# Altium PCB IMU.PcbDoc
Units mm, origin at the board's own origin, x right, y up, seen from the top; angles counter-clockwise.
Board outline 47.31 x 51.69 mm, 2 copper layers (Top Layer, Bottom Layer); 5 components, 76 nets, 125 pads, 18 vias.
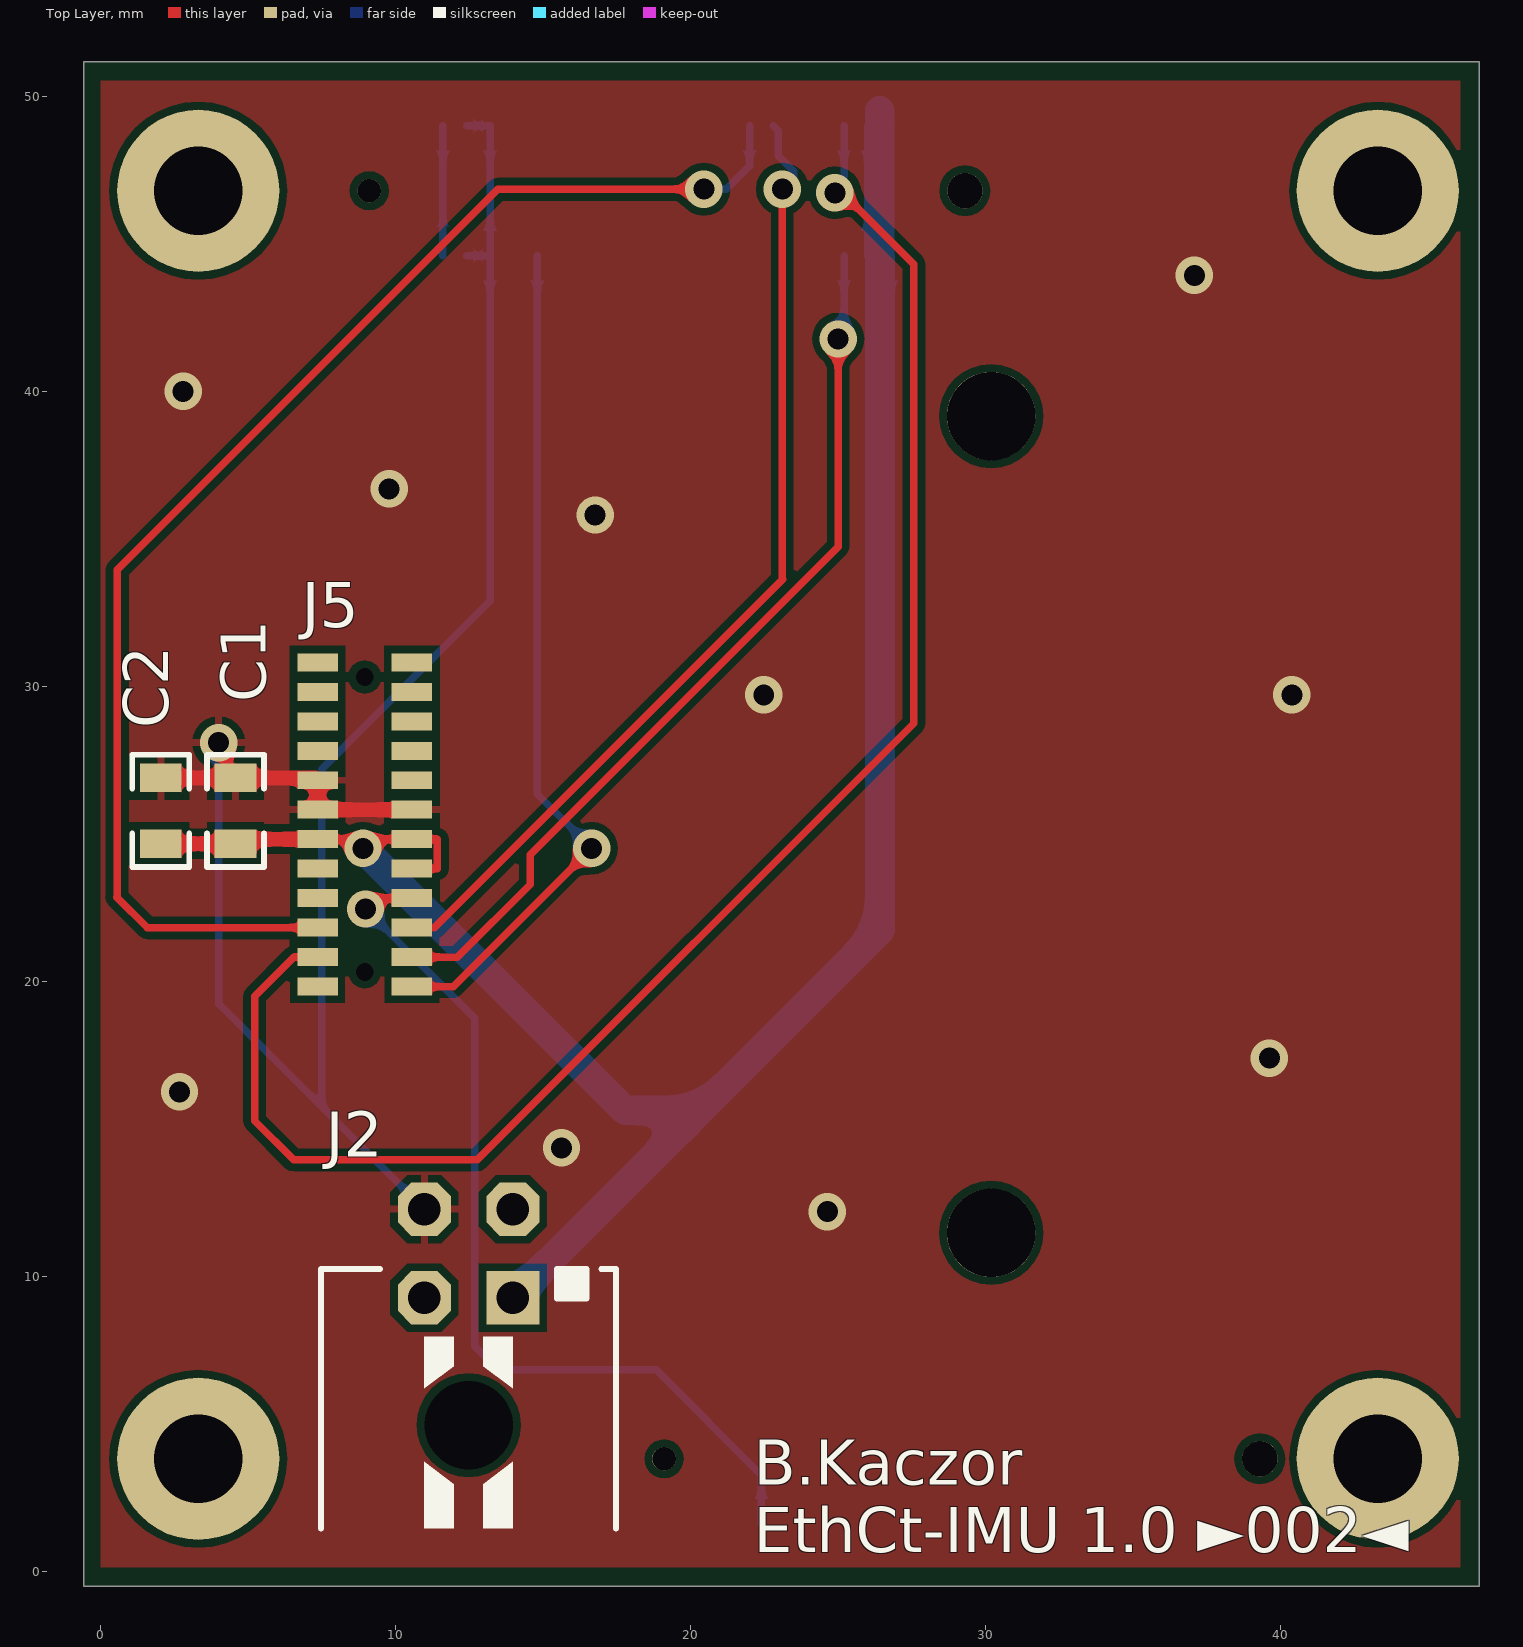
[diagram p0: Top Layer view]
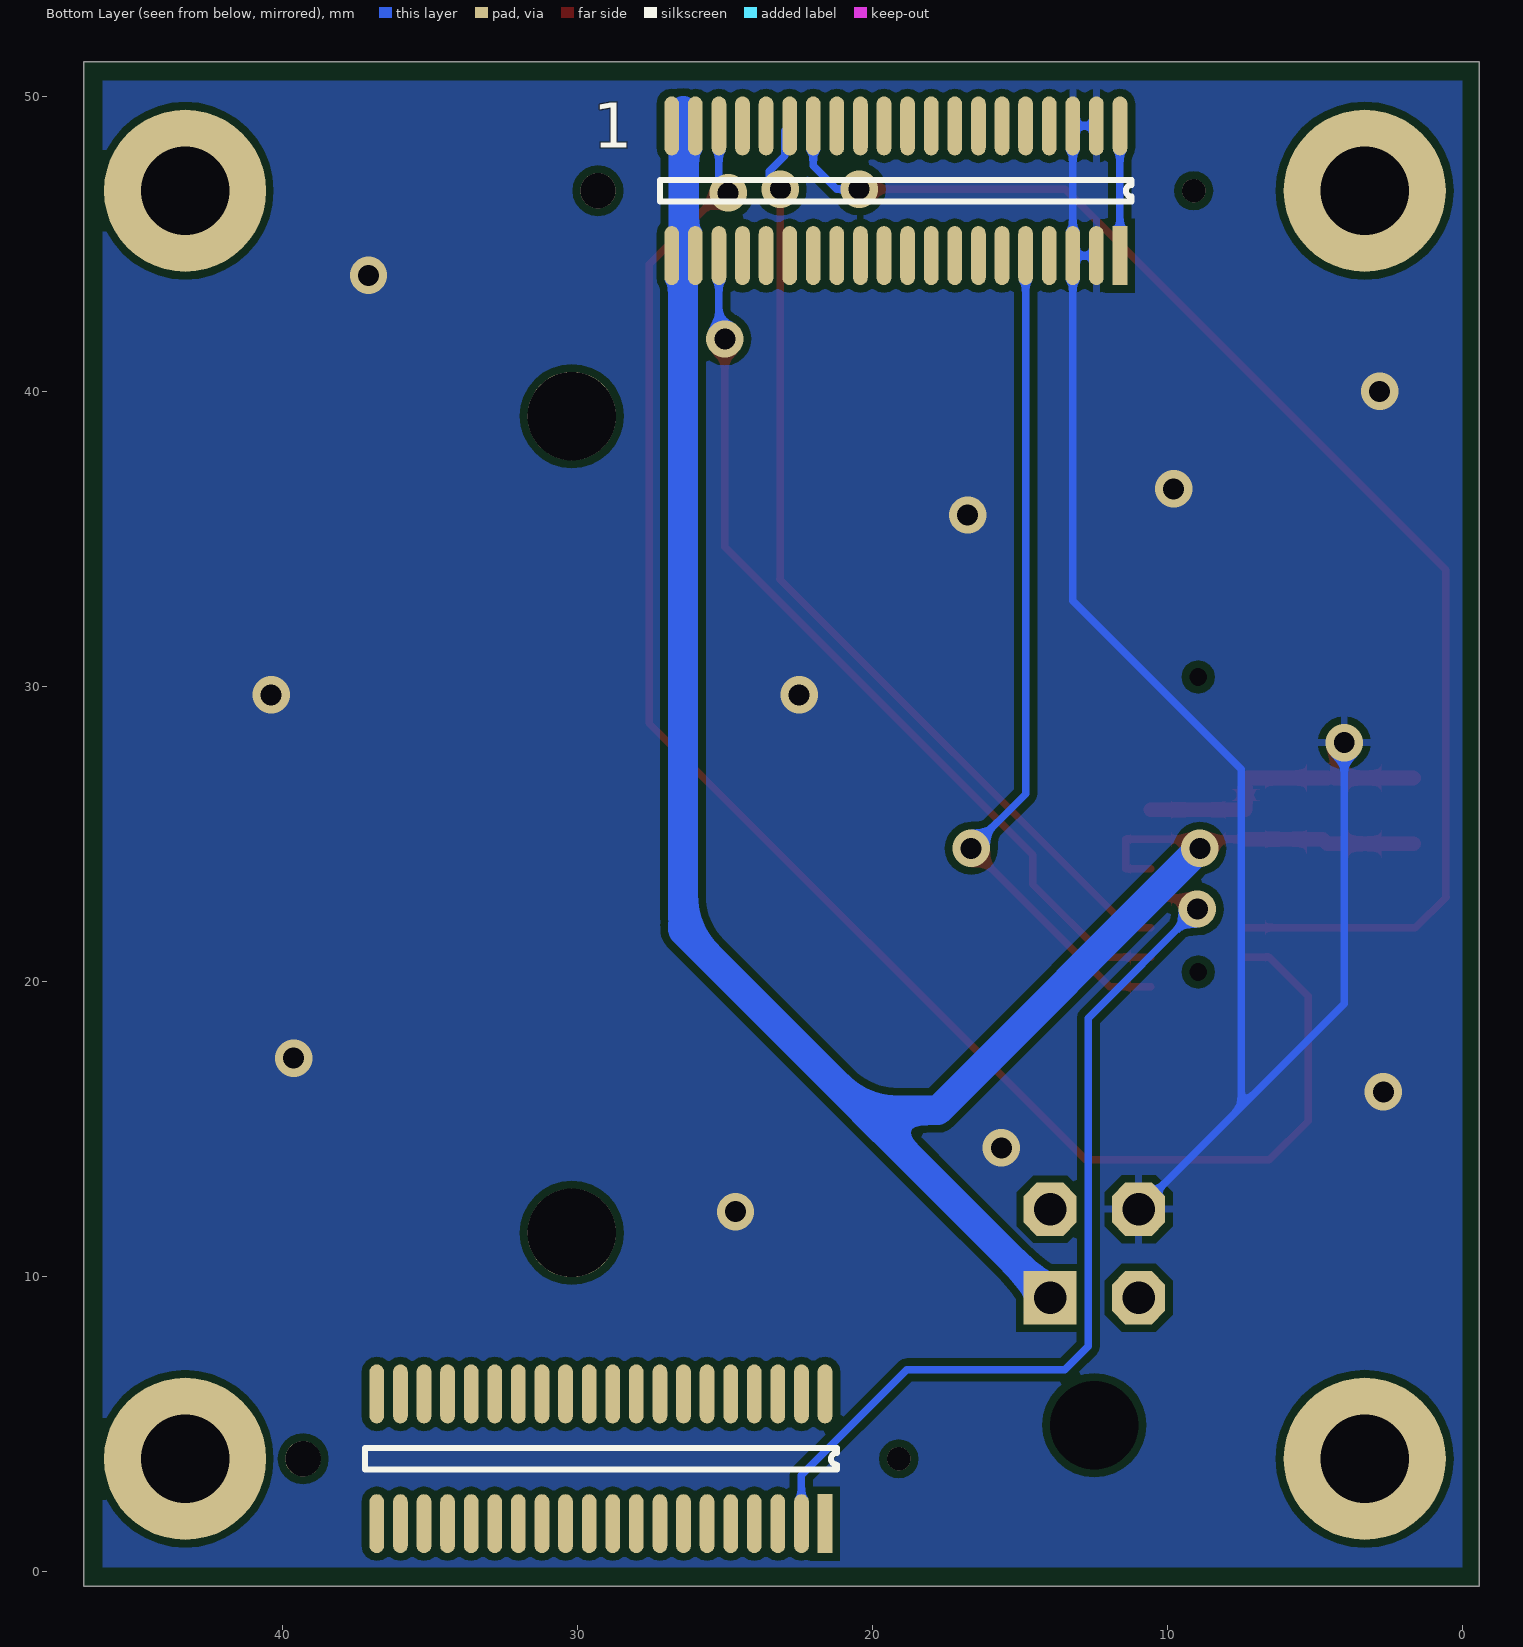
[diagram p1: Bottom Layer view, seen from below]

## Layer stack, top to bottom
Top Solder: solder mask 0.0102, Solder Resist, Dk 3.5
Top Layer: signal copper 0.0356
Dielectric 1: dielectric 0.32, FR-4, Dk 4.8
Bottom Layer: signal copper 0.0356
Bottom Solder: solder mask 0.0102, Solder Resist, Dk 3.5

## Board outline
-0.576,-0.508 -0.576,51.181 46.736,51.181 46.736,-0.508

## Design rules (kind name [scope] priority, off if disabled: settings)
Clearance [All] p1: gap=0.254
HoleSize [All] p1: absolutevalues=TRUE maxlimit=300 minlimit=0.025 maxpercent=80.000 minpercent=20.000
MinimumSolderMaskSliver [All] p1: minsoldermaskwidth=0.01
PolygonConnect [All] p1: connectstyle=Relief reliefconductorwidth=0.254 reliefentries=4 polygonreliefangle="90 Angle" airgapwidth=0.254
RoutingVias [All] p1: holewidth=0.711 width=1.27 viastyle="Through Hole" minholewidth=0.711 minwidth=1.27 maxholewidth=0.711 maxwidth=1.27
SilkToSolderMaskClearance [IsPad] p1: minsilkscreentomaskgap=0.1 clearancetoexposedcopper=TRUE
SolderMaskExpansion [All] p1: expansion=0.102
Width [All] p1: maxlimit=2 minlimit=0.254 preferedwidth=0.254
27 further rules are at their usual default settings.

## Classes and differential pairs
component class IMU: C1 C2 J2 J5

## Components (designator, comment, footprint, x,y, rotation, side; value= is the part's Value field where it differs from the comment)
1 "TE-Fine-Stack-40-S_eth" TE-FINE-STACK-40-P-ETH 39.302,3.81 r90 bottom
C1 "100n" 0805 4.567,25.781 r90 top
C2 "100n" 0805 2.032,25.781 r90 top
J2 "Molex Microfit" "MICROFIT 2x2 Right Angle" 13.97,4.953 r0 top
J5 "Header 12x2" CLM-112-02 8.949,25.32 r90 top

## Footprints (in the part's own frame and the unit in brackets; to place one, negate y for a bottom-side part, rotate by r counter-clockwise, add the part's x,y. Pads: shape width x height; smd on the part's side, far side on the other; paste and mask are expansions set on the pad)
0805 [mil]
  rect 38x56 smd: 1(-44,0) 2(44,0)
  silkscreen extent -75,-38 75,38, body extent -39,-25 39,25, height 39
CLM-112-02 [mm]
  rect 0.61x1.37 smd: 1(-5.5,1.6) 2(-5.5,-1.6) 3(-4.5,1.6) 4(-4.5,-1.6) 5(-3.5,1.6) 6(-3.5,-1.6) 7(-2.5,1.6) 8(-2.5,-1.6) 9(-1.5,1.6) 10(-1.5,-1.6) 11(-0.5,1.6) 12(-0.5,-1.6) 13(0.5,1.6) 14(0.5,-1.6) 15(1.5,1.6) 16(1.5,-1.6) 17(2.5,1.6) 18(2.5,-1.6) 19(3.5,1.6) 20(3.5,-1.6) 21(4.5,1.6) 22(4.5,-1.6) 23(5.5,1.6) 24(5.5,-1.6)
  round 0 hole 0.6 unplated: 25(-5,0) 26(5,0)
"MICROFIT 2x2 Right Angle" [mm] "Molex Right Angle 3.00mm pitch Micro-Fit 3.0 Wire-to-Board Header"
  rect 1.8x1.8 hole 1.1: 1(0,4.32)
  oct 1.8x1.8 hole 1.1: 2(-3,4.32) 3(0,7.32) 4(-3,7.32)
  rect 0x0 hole 3 unplated: MH(-1.5,0)
  silkscreen extent -6.5,-3.5 3.5,5.3, body extent -6.55,-4.72 3.6,7.52, height 8.83
TE-FINE-STACK-40-P-ETH [mm]
  rect 2x0.5 smd: 1(-2.2,-17.7) 41(40.8,-27.7)
  oval 2x0.5 smd: 2(-2.2,-16.9) 3(-2.2,-16.1) 4(-2.2,-15.3) 5(-2.2,-14.5) 6(-2.2,-13.7) 7(-2.2,-12.9) 8(-2.2,-12.1) 9(-2.2,-11.3) 10(-2.2,-10.5) 11(-2.2,-9.7) 12(-2.2,-8.9) 13(-2.2,-8.1) 14(-2.2,-7.3) 15(-2.2,-6.5) 16(-2.2,-5.7) 17(-2.2,-4.9) 18(-2.2,-4.1) 19(-2.2,-3.3) 20(-2.2,-2.5) 21(2.2,-2.5) 22(2.2,-3.3) 23(2.2,-4.1) 24(2.2,-4.9) 25(2.2,-5.7) 26(2.2,-6.5) 27(2.2,-7.3) 28(2.2,-8.1) 29(2.2,-8.9) 30(2.2,-9.7) 31(2.2,-10.5) 32(2.2,-11.3) 33(2.2,-12.1) 34(2.2,-12.9) 35(2.2,-13.7) 36(2.2,-14.5) 37(2.2,-15.3) 38(2.2,-16.1) 39(2.2,-16.9) 40(2.2,-17.7) 42(40.8,-26.9) 43(40.8,-26.1) 44(40.8,-25.3) 45(40.8,-24.5) 46(40.8,-23.7) 47(40.8,-22.9) 48(40.8,-22.1) 49(40.8,-21.3) 50(40.8,-20.5) 51(40.8,-19.7) 52(40.8,-18.9) 53(40.8,-18.1) 54(40.8,-17.3) 55(40.8,-16.5) 56(40.8,-15.7) 57(40.8,-14.9) 58(40.8,-14.1) 59(40.8,-13.3) 60(40.8,-12.5) 61(45.2,-12.5) 62(45.2,-13.3) 63(45.2,-14.1) 64(45.2,-14.9) 65(45.2,-15.7) 66(45.2,-16.5) 67(45.2,-17.3) 68(45.2,-18.1) 69(45.2,-18.9) 70(45.2,-19.7) 71(45.2,-20.5) 72(45.2,-21.3) 73(45.2,-22.1) 74(45.2,-22.9) 75(45.2,-23.7) 76(45.2,-24.5) 77(45.2,-25.3) 78(45.2,-26.1) 79(45.2,-26.9) 80(45.2,-27.7)
  round 1.2 hole 1.2 unplated: 90(0,0) 92(43,-10)
  round 0.8 hole 0.8 unplated: 91(0,-20.2) 93(43,-30.2)
  silkscreen extent -0.37,-28.1 43.36,-2.1, body extent -3.4,-31 46.4,0.8, height 7.75

## Part data
C1 C2: library part C_CER, "Ceramic Capacitor"
J2: library part "Microfit 2x2 Right Angle"

## Free pads (board coordinates)
  round 5.5 hole 3: 0(43.302,3.81) 1(3.302,3.81) 2(3.302,46.81) 3(43.302,46.81)
  round 3 hole 3 unplated: 4(30.189,39.17) 5(30.189,11.47)

## Via types
v1: diameter 1.27, hole 0.711, Top Layer to Bottom Layer, 18 vias

## Nets (pads, with @x,y where several pads share a name; then routed paths per layer and width w, separated by ;. In a path a pad name is that pad's centre, name@x,y a point inside that pad or via, vN(x,y) a via of type N, cw(c..) or ccw(c..) an arc to the next point about the centre after c; other vN are vias at no path point)
3V3: 1.41 1.80 | length 4.4
  Bottom Layer w0.254: 1.41 1.80
5V: 1.59 1.60 1.61 1.62 C1.1 C2.1 J2.1 J5.10 J5.11 J5.12 | length 101.7
  Top Layer w0.254: J5.11 8.581,24.82 v1(8.89,24.511) ; v1@9.017,24.82 J5.12 11.408,24.82 11.408,23.82 J5.10
  Top Layer w0.5: C2.1@1.646,24.663 C1.1 4.724,24.82 J5.11
  Bottom Layer w0.254: v1(8.89,24.511) 9.017,24.384 v1@9.017,24.82 ; 26.416,21.719 26.802,22.105 1.60 26.416,44.61 1.59 1.62 26.416,49.01 1.61
  Bottom Layer w1: v1@9.017,24.384 17.778,15.623 20.32,15.623 ; J2.1 17.778,13.081 20.32,15.623 ; 26.416,49.53 26.416,49.01 26.416,44.61 26.416,21.719 20.32,15.623
CS: 1.66 J5.6 | length 33.4
  Top Layer w0.254: J5.6 11.313,21.82 23.131,33.638 23.114,33.655 v1(23.114,46.863)
  Bottom Layer w0.254: 1.66 22.971,48.841 22.971,47.999 23.495,47.475 23.495,46.99 23.368,46.863 v1(23.114,46.863)
DIN: 1.67 J5.5 | length 46.8
  Top Layer w0.254: J5.5 1.582,21.82 0.542,22.86 0.554,22.872 0.554,33.955 13.462,46.863 v1(20.447,46.863)
  Bottom Layer w0.254: v1(20.447,46.863) 21.209,46.863 22.002,47.656 1.67
DIO1: J5.7
DIO2: J5.9
DIO3: J5.1
DIO4: 1.45 J5.2 | length 28.9
  Top Layer w0.254: J5.2 11.954,19.82 v1(16.645,24.511)
  Bottom Layer w0.254: 1.45 14.802,26.354 v1(16.645,24.511)
DOUT: 1.58 J5.4 | length 30.8
  Top Layer w0.254: J5.4 12.091,20.82 14.557,23.286 14.557,24.299 25.002,34.744 v1(25.002,41.783)
  Bottom Layer w0.254: v1(25.002,41.783) 25.202,41.983 1.58
GND: 1.42 1.43 1.78 1.79 C1.2 C2.2 J2.4 J5.13 J5.14 J5.15 | length 67.2
  Top Layer w0.254: v1(3.996,28.092) 4.326,27.762 4.326,26.899 C1.2 ; J5.15@7.27,26.899 J5.15
  Top Layer w0.5: C2.2@1.646,26.899 C1.2@4.326,26.899 ; C1.2 J5.15@7.27,26.899 ; J5.15 J5.13 J5.14
  Bottom Layer w0.254: v1(3.996,28.092) 3.996,19.247 J2.4 ; 7.493,15.75 7.493,27.195 13.202,32.904 1.43 ; 1.42 1.43 ; 1.79 1.78 1.43
  other v1: 24.638,12.192 15.621,14.351 2.667,16.256 39.624,17.399 22.479,29.718 40.386,29.718 16.764,35.814 9.779,36.703 2.794,40.005 37.084,43.942
PA2: 1.63 J5.3 | length 57.6
  Top Layer w0.254: J5.3 6.536,20.82 5.215,19.499 5.215,15.265 6.536,13.945 12.759,13.945 27.559,28.745 27.559,44.323 25.146,46.736 v1(24.892,46.736)
  Bottom Layer w0.254: v1(24.892,46.736) 24.892,46.99 25.202,47.3 1.63
PB1: 1.2 J5.8 | length 31.3
  Top Layer w0.254: v1(8.974,22.454) 9.341,22.82 J5.8
  Bottom Layer w0.254: v1(8.974,22.454) 12.683,18.745 12.683,7.62 13.47,6.833 18.83,6.833 22.402,3.26 1.2
PB4: 1.29
PB5: 1.30
PC0: 1.3
PC1: 1.38
PC2: 1.39
PC3: 1.40
PD0: 1.19
PD1: 1.22
PD2: 1.21
PD3: 1.20
PD4: 1.26
PD5: 1.25
PD6: 1.24
PD7: 1.23
PE0: 1.14
PE1: 1.15
PE2: 1.16
PE3: 1.17
PE4: 1.28
PE5: 1.27
PF0: 1.57
PF1: 1.68
PF2: 1.56
PF3: 1.69
PF4: 1.55
PG2: 1.54
PG3: 1.70
PG4: 1.71
PG5: 1.53
PG6: 1.52
PG7: 1.72
PH0: 1.10
PH1: 1.9
PH2: 1.65
PH3: 1.64
PJ0: 1.32
PJ1: 1.11
PK4: 1.76
PK5: 1.49
PK6: 1.75
PK7: 1.50
PL5: 1.77
PL6: 1.1
PL7: 1.44
PM4: 1.46
PM5: 1.47
PM6: 1.48
PM7: 1.74
PN0: 1.35
PN1: 1.34
PN2: 1.6
PN3: 1.7
PN4: 1.33
PN5: 1.8
PP0: 1.31
PP1: 1.12
PP3: 1.4
PP4: 1.36
PP5: 1.5
PQ2: 1.18
PQ3: 1.13
PQ4: 1.37
PQ5: 1.51
PQ6: 1.73
pads on no net: 1.90 1.91 1.92 1.93 J2.2 J2.3 J2.MH J5.16 J5.17 J5.18 J5.19 J5.20 J5.21 J5.22 J5.23 J5.24 J5.25 J5.26

## Polygon pours and split planes (outlines as drawn)
GND on Bottom Layer "Bottom Layer-5v" (solid, pour order 2): 0,50.546 0,0.127 46.101,0.127 46.101,50.546
GND on Top Layer "Bottom Layer-5v" (solid, pour order 4): 0,50.546 0,0.127 46.101,0.127 46.101,50.546

## Silkscreen, mask and mechanical layers (free items; w line width, h text height)
Top Overlay:
  text "B.Kaczor / EthCt-IMU 1.0 ►002◄" at 22.142,0.639 h1.52
Mechanical 1:
  the board outline again, w1.2